# EAGLE board somador-vout (EAGLE 9.7.0)

Size 163.99 x 103.01 mm. Coordinates in mm from the lower left corner, seen from the top.
Outline: 0,0 163.99,0 163.99,103 0,103 0,0
Copper layers (1*16): Top 0.035mm / dielectric 1.5mm / Bottom 0.035mm
Design rules "default": minimum track width 6mil, minimum drill 0.35mm, track to track 6mil, track to pad 6mil, pad to pad 6mil, via to via 6mil, smd to smd 6mil, copper to edge 40mil, drill to drill 6mil, minimum pad ring 10mil, minimum via ring 8mil, stop-mask expansion 4mil, vias tented up to drill 0mil, thermal gap 10mil

## Footprints (pad centres in the part's own frame; a part is rotated, then mirrored left to right if it is on the bottom)
LEDRD254W60D565H860B = drill 0.981 pad 1.581: 1 -1.27,0; 2 1.27,0
BATTERY-GENERIC = drill 1.118 pad 3.15 octagon: + 2.54,0; - -2.54,0
RESAD1016W63L850D250B = drill 0.83 pad 1.43: 1 -5.08,0; 2 5.08,0
78B04ST = drill 0.8: 1 -3.81,-3.81; 2 -1.27,-3.81; 3 1.27,-3.81; 4 3.81,-3.81; 5 3.81,3.81; 6 1.27,3.81; 7 -1.27,3.81; 8 -3.81,3.81
DIP762W53P254L1969H508Q14B = drill 0.743 pad 1.343: 1 -3.81,7.62; 2 -3.81,5.08; 3 -3.81,2.54; 4 -3.81,0; 5 -3.81,-2.54; 6 -3.81,-5.08; 7 -3.81,-7.62; 8 3.81,-7.62; 9 3.81,-5.08; 10 3.81,-2.54; 11 3.81,0; 12 3.81,2.54; 13 3.81,5.08; 14 3.81,7.62

## Placement (x,y rotation side)
D1  RED  [LEDRD254W60D565H860B]  67.42,11.41 180 top
P2  BATTERYGENERIC  [BATTERY-GENERIC]  8.26,94.75 180 top
R1  1k  [RESAD1016W63L850D250B]  61.07,6.33 0 top
SW1  SPST-478B04ST  [78B04ST]  37.85,64.59 0 top
U1  74HC32_PDIP  [DIP762W53P254L1969H508Q14B]  100.08,64.59 90 top
U2  74HC08_PDIP  [DIP762W53P254L1969H508Q14B]  67.06,64.59 90 top
U3  74HC32_PDIP  [DIP762W53P254L1969H508Q14B]  149.07,65.78 90 top

## Library data of the parts
D1 = Tinkercad; CATEGORY: Opto-Electronic; SUB-CATEGORY: LED; VALUE: LED_RED
P2 R1 SW1 U1-U3 = Tinkercad

## Nets
D1_C: D1.2 R1.2
P2+: P2.+ SW1.6 SW1.7 SW1.8 U1.14 U2.14 U3.14
P2-: P2.- R1.1 U1.7 U2.7 U3.7
U1_1Y: U1.3 U3.1
U2_1A: SW1.1 U2.1 U2.4
U2_1B: SW1.2 U2.2 U2.13
U2_1Y: U1.1 U2.3
U2_2B: SW1.3 U2.5 U2.12
U2_2Y: U1.2 U2.6
U2_4Y: U2.11 U3.2
U3_1Y: D1.1 U3.3

## Tracks (layer width: path | path; a pad name or v marks a point on that pad's centre or on a via)
D1_C  (1 unrouted)
P2+  (6 unrouted)
P2-  (4 unrouted)
U1_1Y  (1 unrouted)
U2_1A  (2 unrouted)
U2_1B  (2 unrouted)
U2_1Y  (1 unrouted)
U2_2B  (2 unrouted)
U2_2Y  (1 unrouted)
U2_4Y  (1 unrouted)
U3_1Y  (1 unrouted)